# EAGLE board Kruispunt schema (EAGLE 9.1.2)
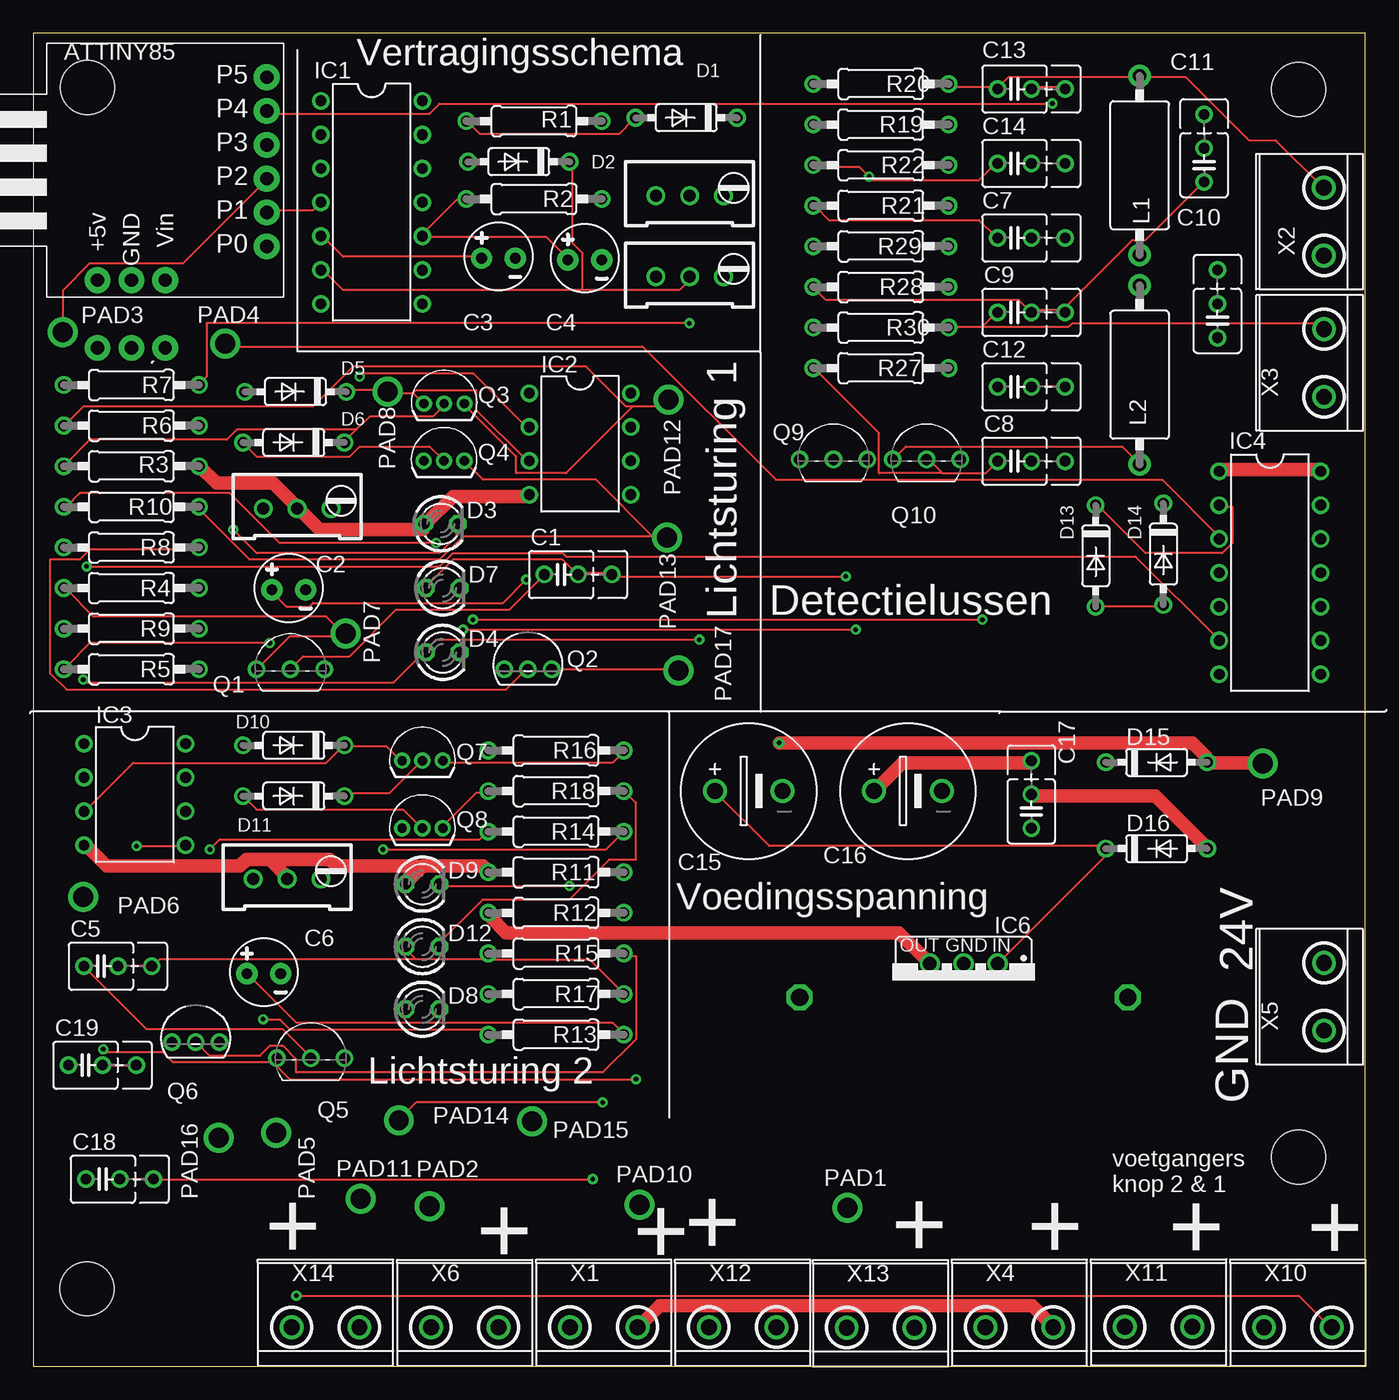
[diagram p0: board, top side]
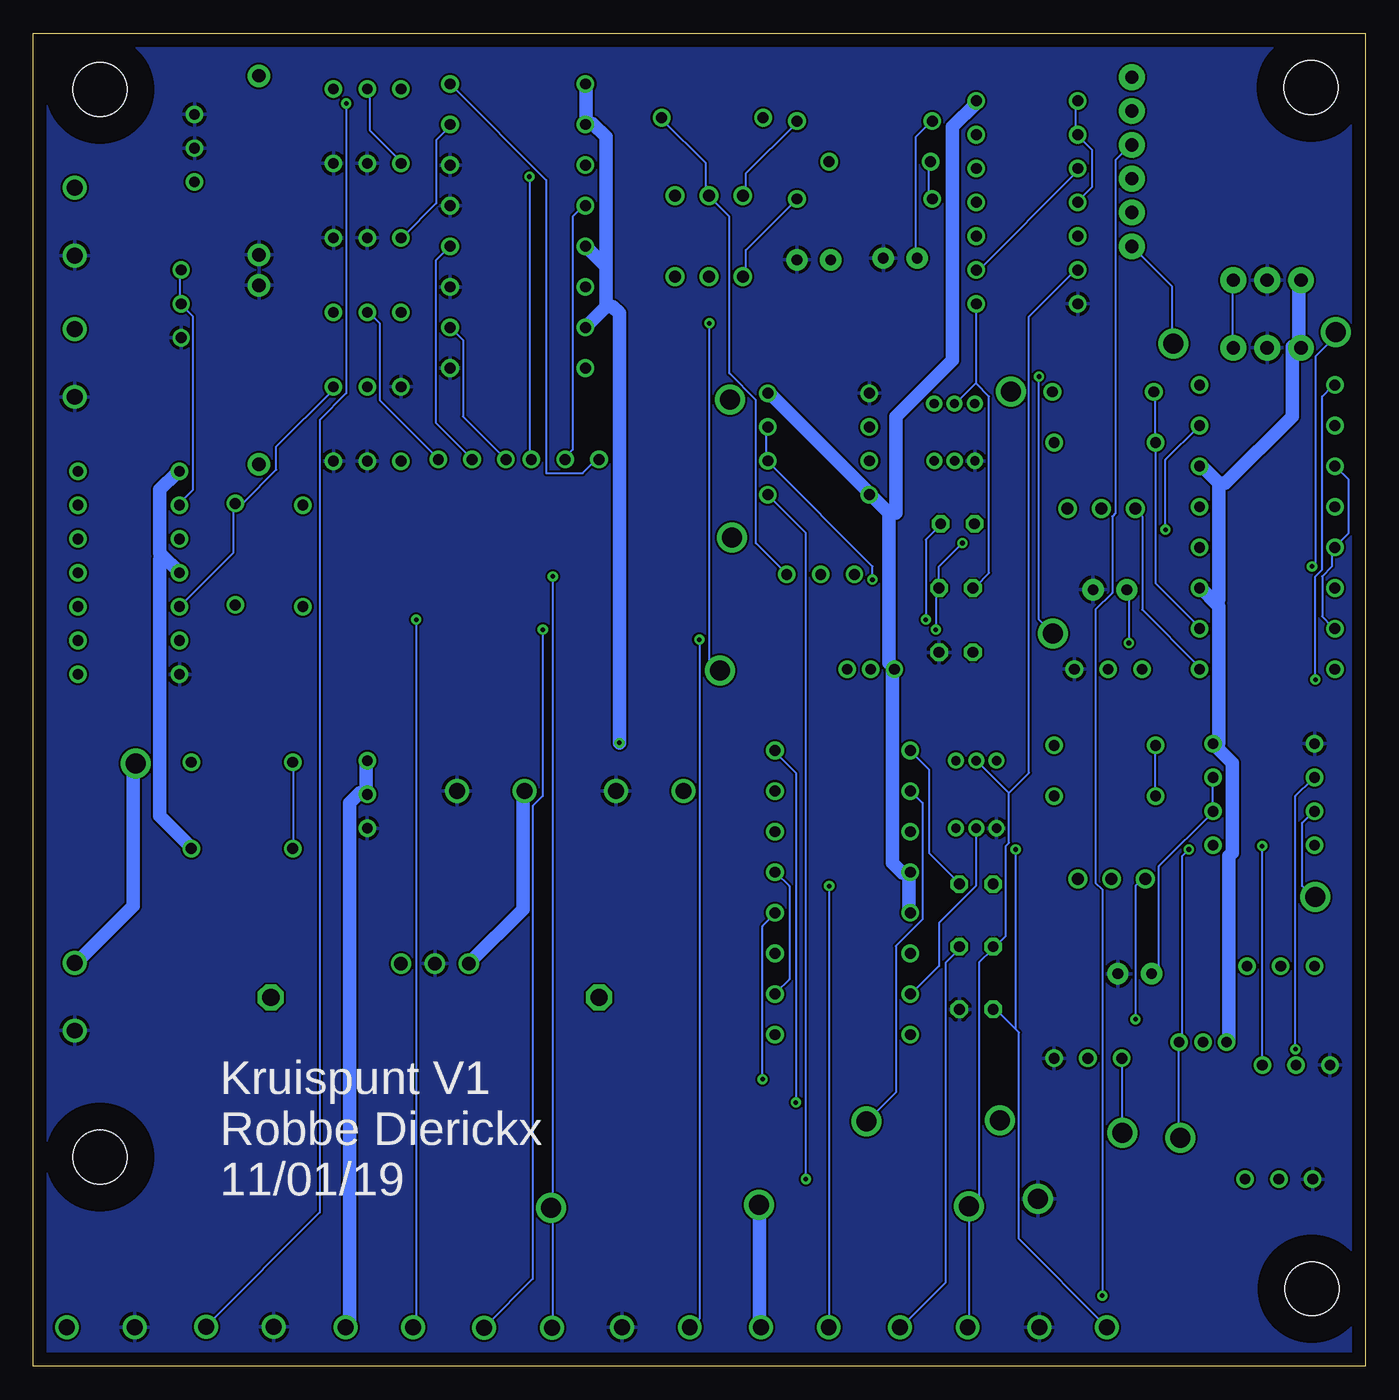
[diagram p1: board, bottom side, seen from below]

Size 100 x 100.07 mm. Coordinates in mm from the lower left corner, seen from the top.
Outline: 0,0 100,0 100,100.07 0,100.07 0,0
Copper layers (1*16): Top 0.035mm / dielectric 1.5mm / Bottom 0.035mm
Design rules "default": minimum track width 6mil, minimum drill 0.35mm, track to track 6mil, track to pad 6mil, pad to pad 6mil, via to via 6mil, smd to smd 6mil, copper to edge 40mil, drill to drill 6mil, minimum pad ring 10mil, minimum via ring 8mil, stop-mask expansion 4mil, vias tented up to drill 0mil, thermal gap 10mil
Net classes: 1 VCC: width 1.016 mm

## Footprints (pad centres in the part's own frame; a part is rotated, then mirrored left to right if it is on the bottom)
DIGISPARK = drill 1 pad 1.93: 5V 17.78,3.81; 5V1 22.86,3.81; GND 17.78,6.35; GND1 22.86,6.35; P0 15.24,16.51; P1 12.7,16.51; P2 10.16,16.51; P3 7.62,16.51; P4 5.08,16.51; P5 2.54,16.51; VIN 17.78,8.89; VIN1 22.86,8.89
CERAMIC-CAP-C025_050-035X075 = drill 0.8: P$1 -1.27,0; P$2 1.27,0; P$3 3.81,0
ELCO-2.5MMLEAD = drill 0.8 pad 1.6: + -1.27,0; - 1.27,0
ELCO-5,0MMLEAD = drill 1.2: + -2.54,0; - 2.54,0
DO35-7 = drill 0.813: A 3.81,0; C -3.81,0
LED3MM = drill 0.813 octagon: A -1.27,0; K 1.27,0
4,0 = hole 4.064: 0,0
DIL14 = drill 0.813: 1 -7.62,-3.81; 2 -5.08,-3.81; 3 -2.54,-3.81; 4 0,-3.81; 5 2.54,-3.81; 6 5.08,-3.81; 7 7.62,-3.81; 8 7.62,3.81; 9 5.08,3.81; 10 2.54,3.81; 11 0,3.81; 12 -2.54,3.81; 13 -5.08,3.81; 14 -7.62,3.81
DIL08 = drill 0.813: 1 -3.81,-3.81; 2 -1.27,-3.81; 3 1.27,-3.81; 4 3.81,-3.81; 5 3.81,3.81; 6 1.27,3.81; 7 -1.27,3.81; 8 -3.81,3.81
LM78XX-HEATSINK = drill 1.016: GND 0,-2.54; IN -2.54,-2.54; OUT 2.54,-2.54 | drill 1.3 octagon: P$1 -12.319,0; P$2 12.319,0
IR-4 = drill 1 pad 1.676: 1 -6.705,0; 2 6.73,0
PAD = drill 1.5: P$1 0,0
TO92-CBE = drill 0.813: B 0,-1.27; C -2.54,-1.27; E 2.54,-1.27
TO92-EBC = drill 0.8: B 0,-0.127; C 1.778,-0.127; E -1.778,-0.127
TO-92 = drill 0.7: 1 -1.524,0; 2 0,0; 3 1.524,0
0207/10 = drill 0.813: 1 -5.08,0; 2 5.08,0
RTRIM64W = drill 0.9: 1 1.27,-2.54; 2 1.27,0; 3 1.27,2.54
W237-132 = drill 1.194: 1 -2.54,-0.635; 2 2.54,-0.635

## Placement (x,y rotation side)
ATTINY85  DIGISPARK  [DIGISPARK]  1.02,99.31 270 top
C1  100nF  [CERAMIC-CAP-C025_050-035X075]  39.62,59.44 0 top
C2  22µF  [ELCO-2.5MMLEAD]  19.18,58.29 0 top
C3  100µF  [ELCO-2.5MMLEAD]  34.92,83.19 0 top
C4  100µF  [ELCO-2.5MMLEAD]  41.4,83.06 0 top
C5  100nF  [CERAMIC-CAP-C025_050-035X075]  5.08,30.04 0 top
C6  22µF  [ELCO-2.5MMLEAD]  17.3,29.46 0 top
C7  10nF  [CERAMIC-CAP-C025_050-035X075]  73.66,84.71 0 top
C8  10nF  [CERAMIC-CAP-C025_050-035X075]  73.66,67.94 0 top
C9  10nF  [CERAMIC-CAP-C025_050-035X075]  73.66,79.12 0 top
C10  220nF  [CERAMIC-CAP-C025_050-035X075]  88.9,78.49 90 top
C11  10nF  [CERAMIC-CAP-C025_050-035X075]  87.9,90.17 90 top
C12  220nF  [CERAMIC-CAP-C025_050-035X075]  73.66,73.53 0 top
C13  10nF  [CERAMIC-CAP-C025_050-035X075]  73.66,95.88 0 top
C14  10nF  [CERAMIC-CAP-C025_050-035X075]  73.66,90.3 0 top
C15  470µF  [ELCO-5,0MMLEAD]  53.72,43.18 0 top
C16  470µF  [ELCO-5,0MMLEAD]  65.66,43.18 0 top
C17  100nF  [CERAMIC-CAP-C025_050-035X075]  74.93,41.66 90 top
C18  10nF  [CERAMIC-CAP-C025_050-035X075]  5.22,14.04 0 top
C19  10nF  [CERAMIC-CAP-C025_050-035X075]  3.92,22.6 0 top
D1  1N4148  [DO35-7]  49.02,93.73 180 top
D2  1N4148  [DO35-7]  36.45,90.42 180 top
D3  Rood  [LED3MM]  30.61,63.25 0 top
D4  Groen  [LED3MM]  30.73,53.59 0 top
D5  1N4148  [DO35-7]  19.68,73.15 180 top
D6  1N4148  [DO35-7]  19.56,69.34 180 top
D7  Geel  [LED3MM]  30.73,58.42 0 top
D8  Groen  [LED3MM]  29.21,26.8 0 top
D9  Rood  [LED3MM]  29.21,36.2 0 top
D10  1N4148  [DO35-7]  19.56,46.61 180 top
D11  1N4148  [DO35-7]  19.56,42.8 180 top
D12  Geel  [LED3MM]  29.21,31.5 0 top
D13  1N4148  [DO35-7]  79.76,60.83 270 top
D14  1N4148  [DO35-7]  84.84,60.96 270 top
D15  1N4004  [DO35-7]  84.33,45.34 0 top
D16  1N4004  [DO35-7]  84.33,38.86 0 top
HOLE1  MOUNT-HOLE-4MM  [4,0]  94.99,15.7 0 top
HOLE2  MOUNT-HOLE-4MM  [4,0]  94.99,95.85 0 top
HOLE3  MOUNT-HOLE-4MM  [4,0]  4.08,96 0 top
HOLE4  MOUNT-HOLE-4MM  [4,0]  4.02,5.81 0 top
IC1  74ACT132N  [DIL14]  25.4,87.38 270 top
IC2  LM555N  [DIL08]  41.04,69.24 270 top
IC3  LM555N  [DIL08]  7.62,42.93 270 top
IC4  74AC132N  [DIL14]  92.84,59.56 270 top
IC6  [LM78XX-HEATSINK]  69.85,27.69 180 top
L1  470µH  [IR-4]  83.06,90.17 270 top
L2  470µH  [IR-4]  83.06,74.42 90 top
PAD1  Meetpin  [PAD]  61.12,11.89 0 top
PAD2  Meetpin  [PAD]  29.76,12 0 top
PAD3  Meetpin  [PAD]  2.22,77.64 0 top
PAD4  Meetpin  [PAD]  14.41,76.78 0 top
PAD5  Meetpin  [PAD]  18.24,17.52 0 top
PAD6  Meetpin  [PAD]  3.76,35.22 0 top
PAD7  Meetpin  [PAD]  23.44,55.01 0 top
PAD8  Meetpin  [PAD]  26.61,73.16 0 top
PAD9  Meetpin  [PAD]  92.31,45.25 0 top
PAD10  Meetpin  [PAD]  45.51,12.12 0 top
PAD11  Meetpin  [PAD]  24.57,12.56 0 top
PAD12  Meetpin  [PAD]  47.69,72.56 0 top
PAD13  Meetpin  [PAD]  47.56,62.22 0 top
PAD14  Meetpin  [PAD]  27.44,18.45 0 top
PAD15  Meetpin  [PAD]  37.44,18.37 0 top
PAD16  Meetpin  [PAD]  13.91,17.15 0 top
PAD17  Meetpin  [PAD]  48.44,52.21 0 top
Q1  BC548  [TO92-CBE]  19.3,53.59 0 top
Q2  2N3906  [TO92-EBC]  37.13,52.45 0 top
Q3  [TO-92]  30.84,72.26 0 top
Q4  [TO-92]  30.83,67.97 0 top
Q5  BC548  [TO92-CBE]  20.83,24.38 0 top
Q6  2N3906  [TO92-EBC]  12.19,24.45 0 top
Q7  [TO-92]  29.21,45.47 0 top
Q8  [TO-92]  29.21,40.39 0 top
Q9  BC548  [TO92-CBE]  60.07,69.34 0 top
Q10  BC548  [TO92-CBE]  67.06,69.34 0 top
R1  8k  [0207/10]  37.59,93.47 0 top
R2  8k  [0207/10]  37.59,87.63 0 top
R3  1k  [0207/10]  7.37,67.56 0 top
R4  10k  [0207/10]  7.37,58.42 0 top
R5  80k  [0207/10]  7.37,52.32 0 top
R6  1k  [0207/10]  7.37,70.61 0 top
R7  1k  [0207/10]  7.37,73.66 0 top
R8  10k  [0207/10]  7.37,61.47 0 top
R9  10k  [0207/10]  7.37,55.37 0 top
R10  1k  [0207/10]  7.37,64.52 0 top
R11  1k  [0207/10]  39.24,37.08 0 top
R12  10k  [0207/10]  39.24,34.04 0 top
R13  80k  [0207/10]  39.24,24.89 0 top
R14  1k  [0207/10]  39.24,40.13 0 top
R15  10k  [0207/10]  39.24,30.99 0 top
R16  1k  [0207/10]  39.24,46.23 0 top
R17  10k  [0207/10]  39.24,27.94 0 top
R18  1k  [0207/10]  39.24,43.18 0 top
R19  47k  [0207/10]  63.63,93.22 0 top
R20  2,2k  [0207/10]  63.63,96.27 0 top
R21  10k  [0207/10]  63.63,87.12 0 top
R22  470  [0207/10]  63.63,90.17 0 top
R23  5k  [RTRIM64W]  49.28,83.06 270 top
R24  5k  [RTRIM64W]  49.28,89.15 270 top
R25  50k  [RTRIM64W]  19.81,65.66 270 top
R26  50k  [RTRIM64W]  19.05,37.85 270 top
R27  10k  [0207/10]  63.63,74.93 0 top
R28  470  [0207/10]  63.63,81.03 0 top
R29  47k  [0207/10]  63.63,84.07 0 top
R30  2,2k  [0207/10]  63.63,77.98 0 top
X1  Rood2  [W237-132]  42.83,3.57 0 top
X2  [W237-132]  96.25,85.92 90 top
X3  [W237-132]  96.27,75.31 90 top
X4  Rood1  [W237-132]  74.03,3.57 0 top
X5  [W237-132]  96.27,27.73 90 top
X6  Geel2  [W237-132]  32.39,3.56 0 top
X10  Voetgagnersknop1  [W237-132]  94.94,3.56 0 top
X11  Voetgangersknop 2 en 1  [W237-132]  84.49,3.59 0 top
X12  Groen1  [W237-132]  53.26,3.57 0 top
X13  Geel1  [W237-132]  63.61,3.53 0 top
X14  Groen2  [W237-132]  21.94,3.56 0 top

## Library data of the parts
ATTINY85 C1-C19 D1 D2 D5 D6 D10 D11 D13-D16 HOLE1-HOLE4 IC1-IC4 IC6 PAD1-PAD17 Q1-Q10 R1-R30 = Kruispunt Library
D3 D4 D7-D9 D12 = Hardware lichtsturing library; MF: VISHAY SEMICONDUCTOR; OC_FARNELL: 1612439
L1 L2 = Detectielus library
X1-X6 X10-X14 = Kruispunt Library; OC_FARNELL: unknown; OC_NEWARK: unknown

## Nets
DIG-IN1: C1.P$2 C1.P$3 D1.C D6.C D7.A IC1.8 PAD1.P$1 Q3.2 R3.1 R8.1 R9.1 R24.2 X13.1
DIG-IN2: C5.P$2 C5.P$3 D2.C D11.C D12.A IC1.6 PAD2.P$1 Q7.2 R11.2 R15.1 R17.2 R23.2 X6.1
GND [VCC]: ATTINY85.GND ATTINY85.GND1 C2.- C3.- C4.- C6.- C7.P$2 C7.P$3 C8.P$2 C8.P$3 C10.P$1 C11.P$2 C11.P$3 C12.P$1 C14.P$2 C14.P$3 C15.- C16.- C17.P$1 C18.P$1 C19.P$1 D4.K D8.K IC1.7 IC2.1 IC3.1 IC4.7 IC6.GND L1.2 L2.2 PAD11.P$1 Q1.E Q4.1 Q5.E Q8.1 R21.2 R22.2 R27.2 R28.2 X2.1 X3.1 X5.1 X10.1 X11.1 X12.2 X14.2
GND5: D13.A D14.A
N$1: ATTINY85.P1 IC1.1 IC1.2 IC1.4
N$2: IC1.3 IC1.9
N$3: C3.+ D1.A IC1.5 R1.1
N$4: C1.P$1 Q1.B
N$5: R13.1 R26.1
N$6: R2.2 R23.1
N$7: C4.+ D2.A IC1.10 R2.1
N$8: IC2.2 PAD7.P$1 Q1.C R4.1
N$9: C2.+ IC2.6 IC2.7 R5.1
N$10: PAD17.P$1 Q2.C R7.2
N$11: D4.A R7.1 X12.1
N$12: Q2.B R8.2
N$13: PAD12.P$1 Q3.3 R6.1
N$14: D3.K R6.2 X4.1
N$15: D5.C IC2.3 PAD8.P$1 Q3.1
N$16: D5.A D6.A Q4.2 R9.2
N$17: PAD13.P$1 Q4.3 R10.2
N$18: D7.K R10.1 X13.2
N$19: C5.P$1 Q5.B
N$20: IC3.2 PAD5.P$1 Q5.C R12.2
N$21: C6.+ IC3.6 IC3.7 R13.2
N$22: PAD16.P$1 Q6.C R14.1
N$23: D8.A R14.2 X14.1
N$24: Q6.B R15.2
N$25: PAD14.P$1 Q7.3 R16.2
N$26: ATTINY85.P3 X10.2
N$27: D10.C IC3.3 PAD6.P$1 Q7.1
N$28: D10.A D11.A Q8.2 R17.1
N$29: PAD15.P$1 Q8.3 R18.1
N$30: D12.K R18.2 X6.2
N$31: C7.P$1 Q9.B R19.2 R21.1
N$32: C13.P$2 C13.P$3 C14.P$1 Q9.E R22.1
N$33: C13.P$1 L1.1 Q9.C R20.2 X2.2
N$34: C10.P$2 C10.P$3 D13.C IC4.2
N$35: ATTINY85.P0 IC4.3 PAD4.P$1
N$36: R1.2 R24.1
N$37: R5.2 R25.1
N$38: C19.P$2 C19.P$3 IC3.5
N$39: C8.P$1 Q10.B R27.1 R29.2
N$40: C9.P$2 C9.P$3 C11.P$1 Q10.E R28.1
N$41: C9.P$1 L2.1 Q10.C R30.2 X3.2
N$42: C12.P$2 C12.P$3 D14.C IC4.5
N$43: C18.P$2 C18.P$3 IC2.5
N$44: ATTINY85.P2 IC4.6 PAD3.P$1
N$45: C15.+ D15.C D16.C IC6.IN
N$46: ATTINY85.P4 X11.2
N$49: D9.K R16.1 X1.1
VCC [VCC]: ATTINY85.5V ATTINY85.5V1 C16.+ C17.P$2 C17.P$3 D3.A D9.A D16.A IC1.14 IC2.4 IC2.8 IC3.4 IC3.8 IC4.1 IC4.4 IC4.14 IC6.OUT PAD10.P$1 Q2.E Q6.E R3.2 R4.2 R11.1 R12.1 R25.2 R26.2 X1.2 X4.2
VCC-LUS [VCC]: D15.A PAD9.P$1 R19.1 R20.1 R29.1 R30.1 X5.2
VIN: ATTINY85.VIN ATTINY85.VIN1

## Tracks (layer width: path | path; a pad name or v marks a point on that pad's centre or on a via)
DIG-IN1  (via drill 0.35)
  Top 0.152: 24.25,70.3 25.25,71.3 30,71.3 30.75,72.05 Q3.2 | 24.25,70.3 23.5,69.55 D6.C | 24.25,70.3 15.25,70.3 14.5,69.55 4.25,69.55 2.5,67.8 R3.1 | D7.A 29.5,58.55 31.5,60.55 39.75,60.55 40.75,59.55 C1.P$2 41,59.55 43.25,59.55 C1.P$3 43.5,59.3 v61,59.3
  Bottom 0.152: R9.1 2.5,55.55 3.25,56.3 3.25,59.3 2.5,60.05 2.5,61.3 R8.1 2.25,61.55 1.25,62.55 1.25,66.55 2.25,67.55 R3.1 | 29.25,73.8 30.75,72.3 Q3.2 | 29.25,73.8 29.25,79.55 IC1.8 | X13.1 61,3.05 61,11.8 PAD1.P$1 61,12.05 v61,59.3 | D1.C 52.75,93.55 49.5,90.3 49.5,88.05 R24.2 49.25,87.8 47.75,86.3 47.75,74.55 45.75,72.55 45.75,61.8 43.5,59.55 C1.P$3 | 29.25,73.8 28.25,72.8 28.25,59.55 29.25,58.55 D7.A
DIG-IN2
  Top 0.152: 41.25,80.8 48.5,80.8 49.25,81.55 R23.2 | 41.25,80.8 23.25,80.8 21.75,82.3 IC1.6 | 41.25,80.8 41.25,83.55 40.5,84.3 40.5,90.3 D2.C | Q7.2 29,45.3 26.75,43.05 23.5,43.05 D11.C | C5.P$2 6.5,30.05 8.75,30.05 C5.P$3 9,30.05 9.5,30.55 28.75,30.55 | 28.75,30.55 28,31.3 D12.A | 33.75,30.55 28.75,30.55 | 33.75,30.55 34,30.8 R15.1 33.75,30.55 | 33.75,30.55 41.75,30.55 44.25,28.05 R17.2
  Bottom 0.152: X6.1 29.75,3.05 29.75,11.8 PAD2.P$1 29.75,12.05 29,12.8 29,30.3 28,31.3 D12.A 27.75,31.55 27,32.3 27,39.05 26.75,39.3 26.75,43.05 | R17.2 44.25,28.05 43.25,29.05 43.25,36.05 44.25,37.05 R11.2 | 26.75,43.05 29,45.3 Q7.2 | 26.75,43.05 25.25,44.55 25.25,78.8 21.75,82.3 IC1.6
GND
  pour Bottom: 0,100.8 100,100.8 100,-0.2 0,-0.2
GND5
  Top 0.152: D13.A 80,57.05 84.75,57.05 D14.A
N$1
  Top 0.152: IC1.4 21.5,87.3 21,86.8 17.75,86.8 ATTINY85.P1
  Bottom 0.152: IC1.1 21.75,94.8 21.75,92.55 IC1.2 21.5,92.3 20.5,91.3 20.5,88.55 21.5,87.55 IC1.4
N$2
  Bottom 0.152: IC1.9 29,82.3 21.75,89.55 21.75,89.8 IC1.3
N$3
  Top 0.152: IC1.5 21.75,84.8 23.25,83.3 33.5,83.3 C3.+ | D1.A 45,93.55 44,92.55 33.5,92.55 32.75,93.3 R1.1
  Bottom 0.152: R1.1 32.75,93.3 33.75,92.3 33.75,83.3 C3.+
N$4
  Top 0.152: C1.P$1 38.25,59.3 35.75,56.8 27.25,56.8 23.75,53.3 20.25,53.3 19.5,52.55 Q1.B
N$5  (via drill 0.35)
  Top 0.152: v17.25,26.05 18.5,26.05 19.25,25.3 33.75,25.3 34,25.05 R13.1
  Bottom 0.152: v17.25,26.05 17.25,36.05 16.75,36.55 R26.1
N$6
  Bottom 0.152: R2.2 42.75,87.55 46.5,83.8 46.5,81.8 R23.1
N$7
  Top 0.152: R2.1 32.5,87.55 31.75,87.55 29.25,85.05 IC1.10 29.25,84.8 38.5,84.8 40,83.3 C4.+
  Bottom 0.152: D2.A 32.75,90.3 32.75,87.8 R2.1
N$8  (via drill 0.35)
  Top 0.152: R4.1 2.5,58.3 4.5,56.3 22,56.3 23.25,55.05 PAD7.P$1 23.25,54.8 19.25,54.8 17,52.55 Q1.C | v24.5,74.3 24.75,74.55 33,74.55 37,70.55 IC2.2
  Bottom 0.152: v24.5,74.3 24.5,56.05 23.5,55.05 PAD7.P$1
N$9  (via drill 0.35)
  Top 0.152: v17.75,54.3 4.25,54.3 2.5,52.55 R5.1 | v37,59.05 35.25,57.3 21,57.3 20.75,57.05 19,57.05 18,58.05 C2.+
  Bottom 0.152: IC2.7 45,70.3 45,68.05 IC2.6 44.75,67.8 37,60.05 v37,59.05 | v17.75,54.3 17.75,58.05 C2.+
N$10  (via drill 0.35)
  Top 0.152: Q2.C 39,52.3 48.25,52.3 PAD17.P$1 | v49.25,78.3 13,78.3 13,74.3 12.5,73.8 R7.2
  Bottom 0.152: v49.25,78.3 49.25,53.05 48.5,52.3 PAD17.P$1
N$11  (via drill 0.35)
  Top 0.152: v3.75,51.55 4,51.3 27,51.3 29.25,53.55 D4.A 29.5,53.8 30.25,54.55 v50,54.55
  Bottom 0.152: v3.75,51.55 3.75,59.3 3.25,59.8 3.25,72.8 2.5,73.55 R7.1 | v50,54.55 50,3.55 50.5,3.05 X12.1
N$12
  Top 0.152: Q2.B 37,52.3 35.5,50.8 2.5,50.8 1.25,52.05 1.25,60.55 3.5,60.55 4.25,61.3 12.25,61.3 R8.2
N$13
  Top 0.152: 45,72.05 40,67.05 36.25,67.05 36.25,68.3 32.5,72.05 Q3.3 | 45,72.05 47,72.05 47.5,72.55 PAD12.P$1 | 45,72.05 44.5,72.05 41.5,75.05 24,75.05 21,72.05 3.75,72.05 2.5,70.8 R6.1
N$14  (via drill 0.35)
  Top 0.152: v15,62.8 16.75,61.05 30.5,61.05 31.75,62.3 31.75,63.05 D3.K | v33,56.05 v71.25,56.05
  Bottom 0.152: v15,62.8 15,68.05 12.5,70.55 R6.2 | v71.25,56.05 71.25,3.05 X4.1 | v33,56.05 33,62.05 32,63.05 D3.K
N$15
  Top 0.152: 28.5,73.05 29.25,72.3 Q3.1 | 28.5,73.05 26.75,73.05 PAD8.P$1 26.5,73.3 23.5,73.3 D5.C | 28.5,73.05 28.75,73.3 33.25,73.3 33.25,71.8 37,68.05 IC2.3
N$16
  Top 0.152: Q4.2 30.75,68.05 29.75,69.05 24.5,69.05 23.75,68.3 16.75,68.3 15.75,69.3 D6.A
  Bottom 0.152: R9.2 12.5,55.55 15.75,58.8 15.75,69.3 D6.A 15.75,69.55 15.75,73.05 D5.A
N$17
  Top 0.152: 46.5,62.3 42.25,66.55 33.75,66.55 32.5,67.8 Q4.3 | 46.5,62.3 47.5,62.3 PAD13.P$1 46.5,62.3 | 46.5,62.3 32.25,62.3 30.5,60.55 16.25,60.55 12.5,64.3 R10.2
N$18  (via drill 0.35)
  Top 0.152: v30.25,61.8 18.5,61.8 14.75,65.55 3.5,65.55 2.5,64.55 R10.1 | v32.25,55.3 v61.75,55.3
  Bottom 0.152: v30.25,61.8 32,60.05 32,58.55 D7.K 32.25,58.3 v32.25,55.3 | v61.75,55.3 61.75,42.8 62.5,42.05 62.5,6.55 66,3.05 X13.2
N$19
  Top 0.152: C5.P$1 4,29.8 8.5,25.3 18.75,25.3 20.75,23.3 Q5.B
N$20  (via drill 0.35)
  Top 0.152: v5.25,23.8 5.5,23.55 9.75,23.55 10.5,22.8 18,22.8 | 18,22.8 18.25,23.05 Q5.C 18,22.8 | v45.25,21.55 19.25,21.55 18,22.8
  Bottom 0.152: Q5.C 18.25,23.05 18.25,17.55 PAD5.P$1 | v5.25,23.8 5.25,42.8 4,44.05 IC3.2 | v45.25,21.55 45.25,33.05 44.5,33.8 R12.2
N$21
  Top 0.152: R13.2 44.25,25.05 43.5,25.8 19.75,25.8 16.25,29.3 C6.+
  Bottom 0.152: IC3.7 11.5,44.05 11.5,41.8 IC3.6 11.5,41.55 15.5,37.55 15.5,30.05 16,29.55 C6.+
N$22  (via drill 0.35)
  Top 0.152: v13.25,38.8 14,39.55 33.5,39.55 34,40.05 R14.1
  Bottom 0.152: PAD16.P$1 14,17.3 14,24.3 Q6.C 13.75,24.55 13.75,38.3 v13.25,38.8
N$23  (via drill 0.35)
  Top 0.152: v26.25,38.8 43,38.8 44.25,40.05 R14.2
  Bottom 0.152: 26.25,25.3 26,25.05 26,9.55 19.5,3.05 X14.1 | 26.25,25.3 27.75,26.8 D8.A | 26.25,25.3 v26.25,38.8
N$24
  Top 0.152: Q6.B 12.25,24.3 13.25,23.3 17,23.3 17.75,24.05 18.75,24.05 19.75,23.05 19.75,22.05 42.75,22.05 45.25,24.55 45.25,30.8 44.5,30.8 R15.2
N$25  (via drill 0.35)
  Top 0.152: Q7.3 30.75,45.3 43.5,45.3 44.25,46.05 R16.2 | v42.75,19.8 28.75,19.8 27.5,18.55 PAD14.P$1
  Bottom 0.152: v42.75,19.8 42.75,44.55 44.25,46.05 R16.2
N$26  (via drill 0.35)
  Top 0.152: v19.75,5.3 95,5.3 97.25,3.05 X10.2
  Bottom 0.152: v19.75,5.3 19.75,35.8 20.25,36.3 20.25,56.8 19,58.05 19,63.8 18.75,64.05 18.75,90.55 17.75,91.55 ATTINY85.P3
N$27
  Top 0.152: Q7.1 27.5,45.55 26.5,46.55 23.5,46.55 D10.C 23.25,46.55 22,45.3 7.5,45.3 4,41.8 IC3.3
  Bottom 0.152: IC3.3 4,41.55 4.75,40.8 4.75,36.05 4,35.3 PAD6.P$1
N$28
  Top 0.152: Q8.2 29,40.55 27.75,41.8 16.75,41.8 D11.A
  Bottom 0.152: D10.A 15.75,46.55 15.75,43.05 D11.A | R17.1 34,28.05 32,30.05 32,33.3 29.25,36.05 29.25,40.3 Q8.2
N$29
  Top 0.152: Q8.3 30.75,40.55 33.25,43.05 34,43.05 R18.1
  Bottom 0.152: PAD15.P$1 37.25,18.55 35.25,20.55 35.25,31.55 33.25,33.55 33.25,42.3 34,43.05 R18.1
N$30
  Top 0.152: R18.2 44.5,43.05 45.25,42.3 45.25,38.05 43.25,38.05 40.25,35.05 33.75,35.05 30.25,31.55 D12.K
  Bottom 0.152: D12.K 30.5,31.3 31.5,30.3 31.5,6.3 34.75,3.05 X6.2
N$31
  Top 0.152: C7.P$1 72.25,84.8 71,86.05 59.75,86.05 58.75,87.05 R21.1
  Bottom 0.152: C7.P$1 72.25,84.8 69.75,87.3 69.75,92.05 68.75,93.05 R19.2 | Q9.B 60,68.3 59.5,68.8 59.5,86.3 58.75,87.05 R21.1
N$32  (via drill 0.35)
  Top 0.152: C13.P$3 77.25,96.05 75,96.05 C13.P$2 | R22.1 58.75,90.05 62,90.05 v62.75,89.3 63,89.05 71,89.05 72.25,90.3 C14.P$1
  Bottom 0.152: C14.P$1 72.5,90.55 74.75,92.8 74.75,95.8 C13.P$2 | v62.75,89.3 62.75,68.3 Q9.E
N$33
  Top 0.152: R20.2 68.75,96.05 72.25,96.05 C13.P$1 72.5,96.05 73.25,96.8 83,96.8 L1.1 83.25,96.8 86.5,96.8 91.25,92.05 93.25,92.05 96.75,88.55 X2.2
  Bottom 0.152: Q9.C 57.75,68.05 58.75,67.05 61.5,67.05 61.5,89.05 68.5,96.05 R20.2
N$34
  Top 0.152: D13.C 80,64.55 83.5,61.05 89.25,61.05 90,61.8 90,64.55 89.25,64.55 IC4.2
  Bottom 0.152: C10.P$3 89,82.3 89,79.8 C10.P$2 88.75,79.55 88,78.8 88,65.8 89,64.8 IC4.2
N$35
  Top 0.152: IC4.3 89,62.3 84.75,66.55 55.75,66.55 45.75,76.55 14.5,76.55 PAD4.P$1
  Bottom 0.152: ATTINY85.P0 17.5,84.05 14.5,81.05 14.5,76.8 PAD4.P$1
N$36
  Bottom 0.152: R1.2 42.75,93.3 46.5,89.55 46.5,88.05 R24.1
N$37
  Bottom 0.152: R5.2 12.5,52.55 16.75,56.8 16.75,63.8 17.25,64.3 R25.1
N$38  (via drill 0.35)
  Top 0.152: C19.P$2 5.25,22.55 7.5,22.55 C19.P$3 | v7.75,39.05 11.25,39.05 IC3.5
  Bottom 0.152: v7.75,39.05 7.75,22.8 C19.P$3
N$39
  Top 0.152: 68.25,67.05 71.5,67.05 72.25,67.8 C8.P$1 | 68.25,67.05 67.25,68.05 Q10.B | 68.25,67.05 63.5,67.05 63.5,70.05 58.75,74.8 R27.1
  Bottom 0.152: R29.2 68.75,84.05 69.75,83.05 69.75,70.8 67.25,68.3 Q10.B
N$40
  Top 0.152: 77.25,79.3 75,79.3 C9.P$2 74.75,79.3 74,80.05 59.5,80.05 58.75,80.8 R28.1 | 77.25,79.3 C9.P$3 77.25,79.3 | 77.25,79.3 82.5,84.55 83.5,84.55 87.75,88.8 C11.P$1
  Bottom 0.152: Q10.E 69.75,68.3 74,72.55 74,78.3 74.75,79.05 C9.P$2
N$41
  Top 0.152: 71.25,78.05 72.25,79.05 C9.P$1 | 71.25,78.05 68.75,78.05 R30.2 | L2.1 83,67.8 81.75,69.05 65.5,69.05 64.75,68.3 Q10.C | 71.25,78.05 77.75,78.05 78,78.3 96.5,78.3 96.75,78.05 X3.2
  Bottom 0.152: Q10.C 64.75,68.3 67.75,71.3 67.75,77.05 68.5,77.8 R30.2
N$42
  Top 0.152: C12.P$2 75,73.55 77.25,73.55 C12.P$3
  Bottom 0.152: IC4.5 89,57.05 85,61.05 85,64.55 D14.C 84.75,64.8 84.25,64.8 81.75,67.3 81.75,69.05 77.5,73.3 C12.P$3
N$43  (via drill 0.35)
  Top 0.152: C18.P$2 9,14.05 C18.P$3 9.25,14.05 v42,14.05
  Bottom 0.152: v42,14.05 42,62.55 44.75,65.3 IC2.5
N$44  (via drill 0.35)
  Top 0.152: v4,60.05 30.5,60.05 31.5,61.05 39.75,61.05 40,60.8 82.75,60.8 89,54.55 IC4.6 | ATTINY85.P2 17.5,89.05 11.25,82.8 4.25,82.8 2.25,80.8 2.25,77.8 PAD3.P$1
  Bottom 0.152: v4,60.05 3.75,60.3 3.75,75.8 2.25,77.3 2.25,77.55 PAD3.P$1
N$45
  Top 0.152: IC6.IN 72.5,30.3 80.5,38.3 80.5,38.8 D16.C 80.5,39.05 55.25,39.05 51.25,43.05 C15.+
  Bottom 0.152: D16.C 80.5,39.05 80.5,45.3 D15.C
N$46  (via drill 0.35)
  Top 0.152: v76.5,94.8 30.5,94.8 29.75,94.05 17.75,94.05 ATTINY85.P4
  Bottom 0.152: v76.5,94.8 76.5,73.05 78.5,71.05 78.5,11.55 87,3.05 X11.2
N$49  (via drill 0.35)
  Top 0.152: v40.25,36.05 30.5,36.05 D9.K
  Bottom 0.152: D9.K 30.5,36.3 32.75,38.55 32.75,44.8 34,46.05 R16.1 | v40.25,36.05 40.25,3.05 X1.1
VCC
  Top 1.016: 29,37.3 29.25,37.55 33.75,37.55 34,37.3 R11.1 | 29,37.3 28,36.3 D9.A | 17.75,38.05 16,38.05 15.5,37.55 5.5,37.55 4,39.05 IC3.4 | 17.75,38.05 19,36.8 R26.2 | 29,37.3 28.75,37.55 22.75,37.55 22.25,38.05 18.25,38.05 17.75,38.05 | IC2.4 37,65.3 31.5,65.3 29.5,63.3 D3.A 29.25,62.8 21.5,62.8 20,64.3 R25.2 19.5,64.8 18,66.3 13.75,66.3 12.5,67.55 R3.2 | X4.2 76.5,3.05 75,4.55 47,4.55 45.5,3.05 X1.2 | IC4.14 96.5,67.3 89.25,67.3 IC4.1 | D16.A 88,39.05 84.25,42.8 75,42.8 C17.P$2 | C16.+ 63.25,43.3 65.25,45.3 74.75,45.3 C17.P$3 | R12.1 34.25,33.8 35.5,32.55 65,32.55 67.25,30.3 IC6.OUT
  Bottom 1.016: ATTINY85.5V 5,81.3 5,76.55 ATTINY85.5V1 5.5,76.55 5.5,71.3 10.5,66.3 11,66.3 | Q6.E 10.25,24.55 10.25,38.3 10,38.55 10,45.3 11.25,46.55 IC3.8 11,46.8 11,57.05 11.25,57.3 | 11.25,57.3 12.25,58.3 R4.2 | 11,66.3 12.25,67.55 R3.2 | 11,66.3 11,57.55 11.25,57.3 | R12.1 34.25,34.05 34.25,37.05 R11.1 34.75,37.05 35.5,37.8 35.5,52.05 Q2.E 35.5,52.55 35.75,52.8 35.75,64.05 | 35.75,64.05 37,65.3 IC2.4 37.5,65.8 44.75,73.05 IC2.8 | IC1.14 29.25,94.8 31,93.05 31,75.55 35.25,71.3 35.25,64.05 35.75,64.05 | X1.2 45.5,3.05 45.5,12.05 PAD10.P$1 | IC6.OUT 67.25,30.3 63.25,34.3 63.25,43.05 C16.+ | 90.25,60.8 90.5,61.05 90.5,65.8 89.25,67.05 IC4.1 | 90.25,60.8 89.25,59.8 IC4.4 | C17.P$3 75,45.3 75,43.05 C17.P$2 75.5,43.05 76.25,42.3 76.25,3.3 76.5,3.05 X4.2 | 90.25,60.8 90.5,60.55 90.5,41.3 88.25,39.05 D16.A
VCC-LUS  (via drill 0.35)
  Top 1.016: PAD9.P$1 92.25,45.3 88.25,45.3 D15.A 88,45.8 87,46.8 v56,46.8
  Bottom 1.016: R20.1 58.5,96.05 58.5,93.3 R19.1 58,93.3 57,92.3 57,83.05 57,82.55 | 57,79.55 58.5,78.05 R30.1 | 57,82.55 57,79.55 | 57,82.55 58.5,84.05 R29.1 | X5.2 96.75,30.3 92.5,34.55 92.5,45.05 PAD9.P$1 | v56,46.8 56,79.05 56.5,79.55 57,79.55
VIN
  Bottom 0.152: ATTINY85.VIN1 10,76.55 10,81.3 ATTINY85.VIN

## Text on the board
tPlace: Detectielussen | Lichtsturing 1 | 24V | Voedingsspanning | Lichtsturing 2 | GND | voetgangers / knop 2 & 1 | + | + | + | + | + | + | + | +
bPlace: Kruispunt V1 / Robbe Dierickx / 11/01/19
tNames: Vertragingsschema